# Altium PCB Buck_PCB.PcbDoc
Units mm, origin at the board's own origin, x right, y up, seen from the top; angles counter-clockwise.
Board outline 28.32 x 29.08 mm, 2 copper layers (Top Layer, Bottom Layer); 12 components, 5 nets, 34 pads, 6 vias.
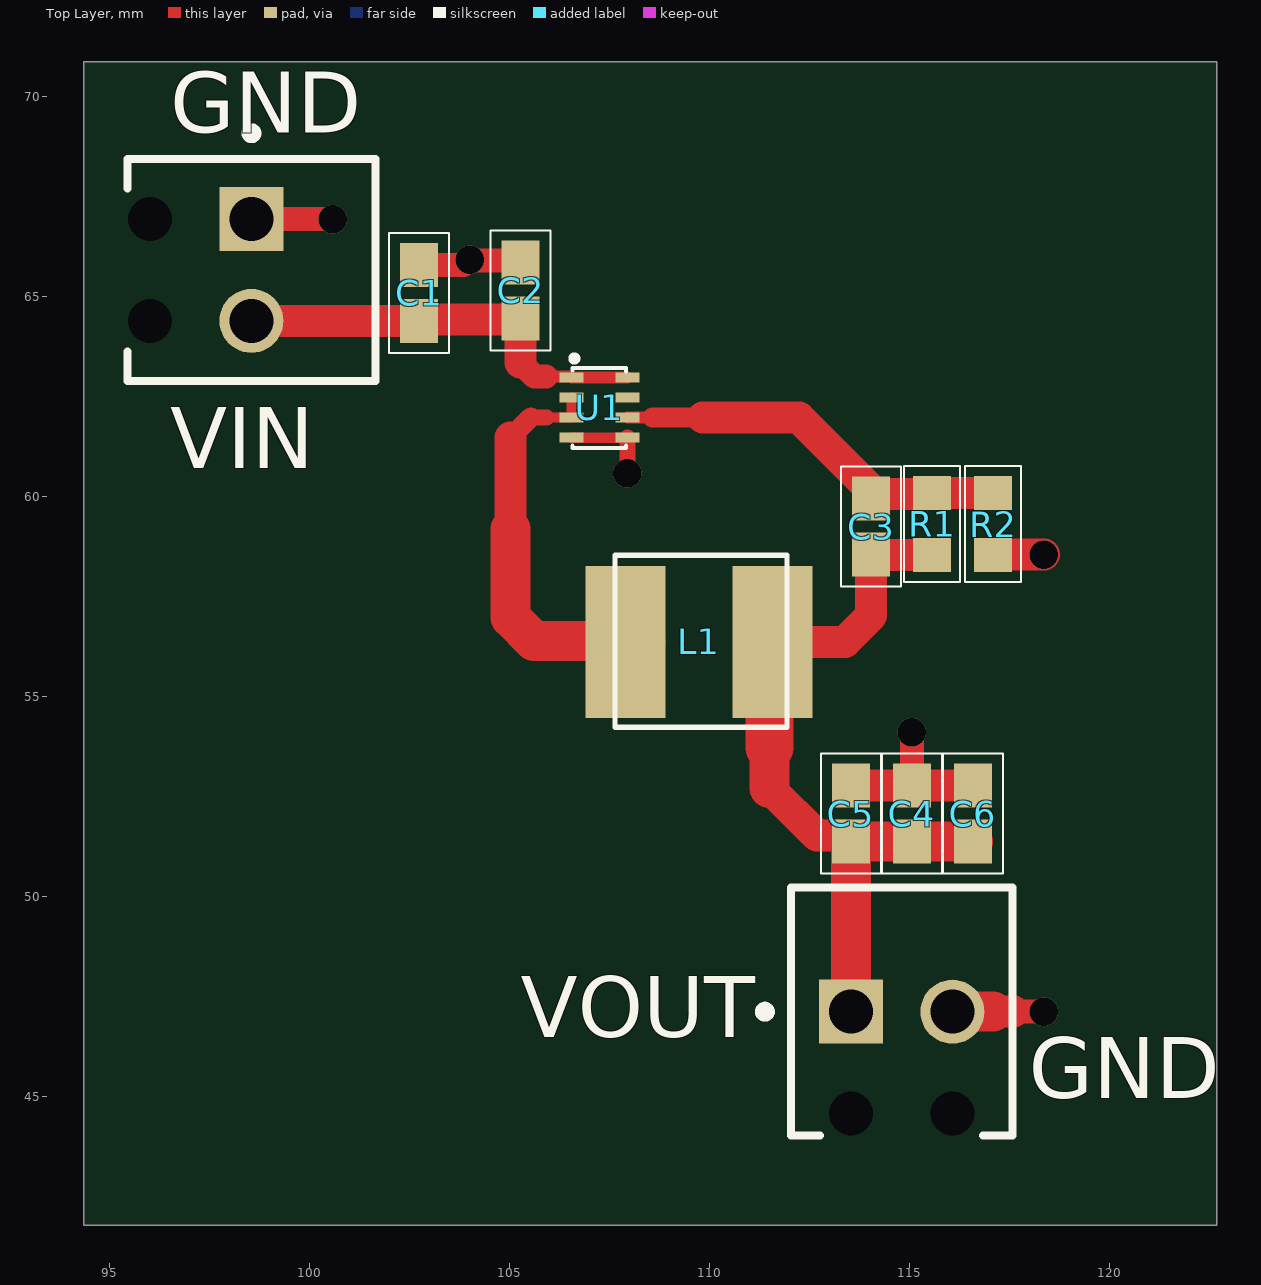
[diagram p0: Top Layer view]
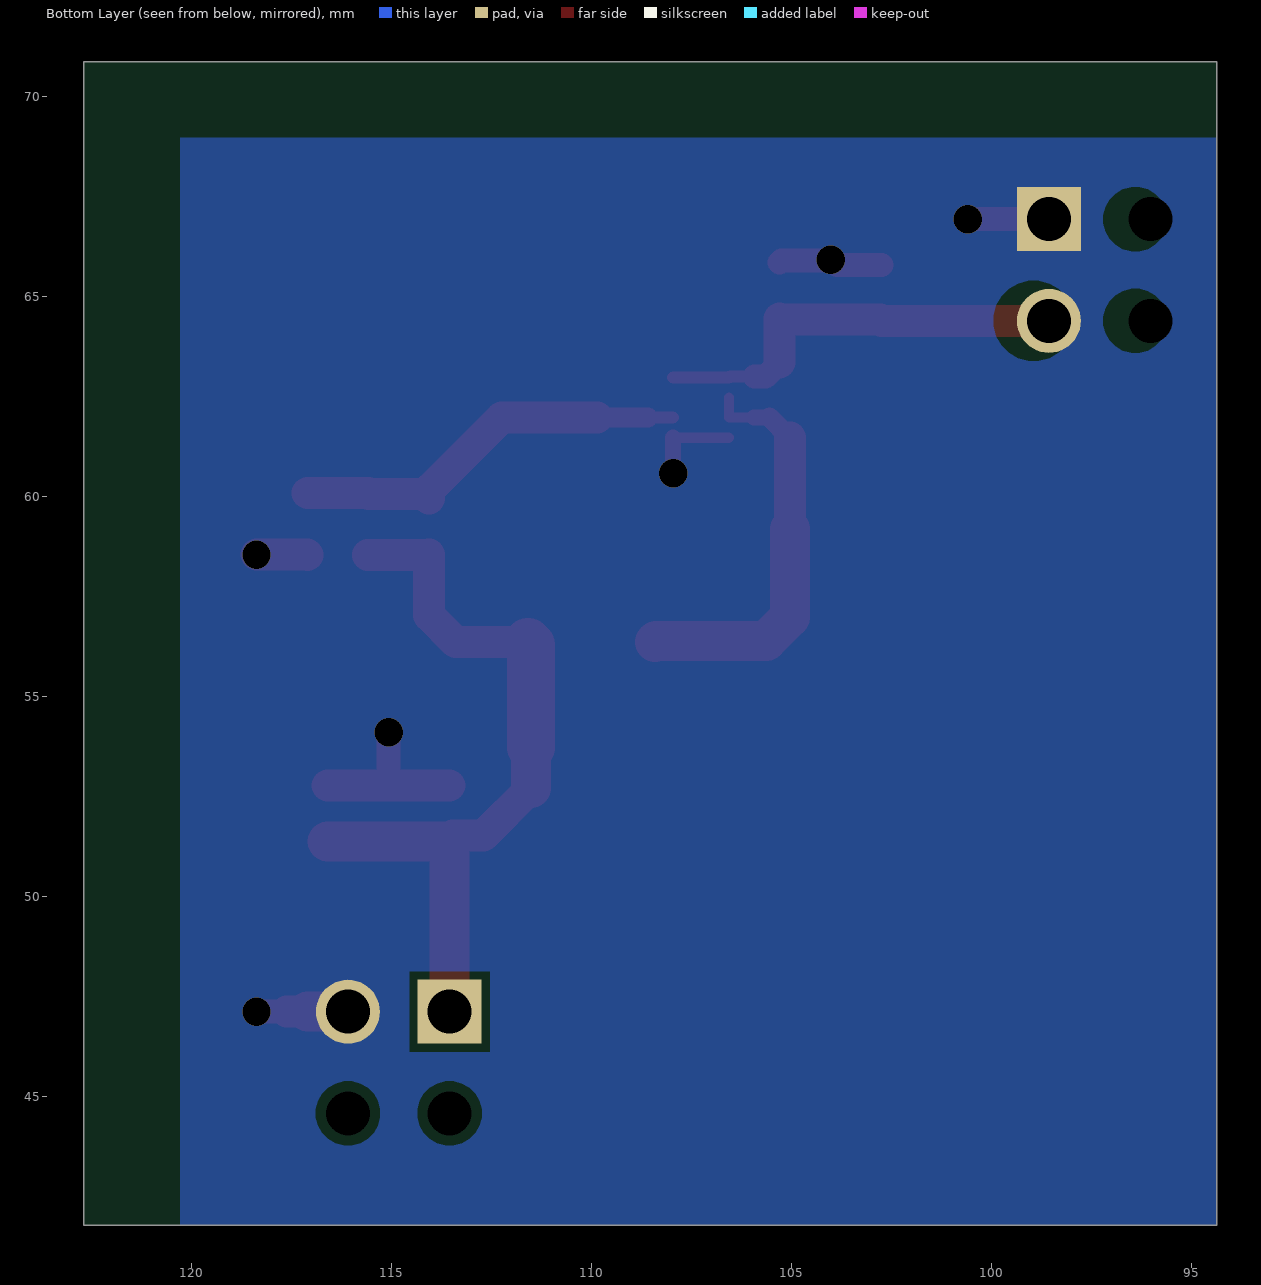
[diagram p1: Bottom Layer view, seen from below]
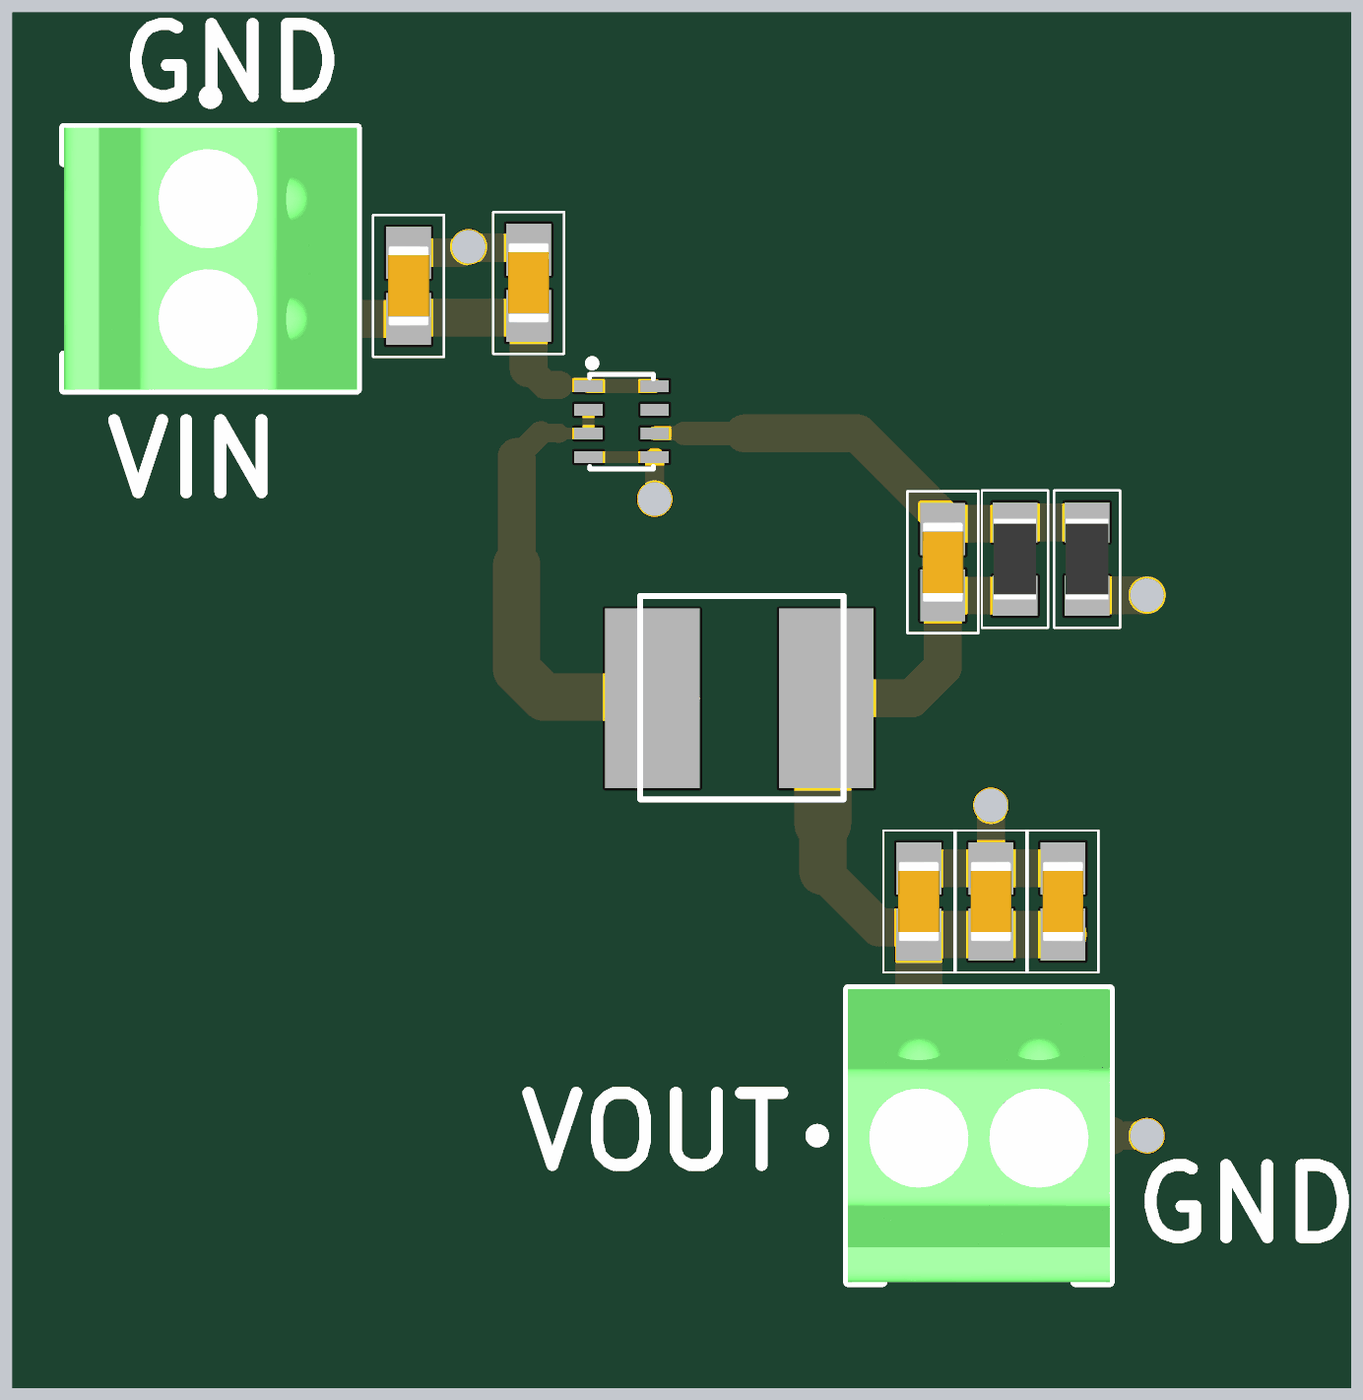
[diagram p2: 3D render of the assembled board from above, using the file's embedded part models]

## Layer stack, top to bottom
Top Solder: solder mask 0.0102, Solder Resist, Dk 3.5
Top Layer: signal copper 0.0356
Dielectric 1: dielectric 0.32, FR-4, Dk 4.8
Bottom Layer: signal copper 0.0356
Bottom Solder: solder mask 0.0102, Solder Resist, Dk 3.5

## Board outline
94.361,41.783 94.361,70.866 122.682,70.866 122.682,41.783

## Design rules (kind name [scope] priority, off if disabled: settings)
Clearance "Stitching No Net" [IsStitchingVia and InNet('No Net') vs (IsVia and (Not IsStitchingVia)) Or IsPad] p1: gap=0.127 ignorepadtopadclearanceinfootprint=FALSE
Clearance [All] p2: gap=0.2 ignorepadtopadclearanceinfootprint=TRUE except(0.102: Arc-Text Track-Text SMDPad-Text THPad-Text Fill-Text Poly-Text Region-Text Text-Text; 0.114: Arc-Arc Arc-Track Arc-SMDPad Arc-Via Track-Track Track-SMDPad Track-Via; 0.127: Via-Text; 0.152: Arc-THPad Track-THPad SMDPad-SMDPad SMDPad-THPad SMDPad-Via THPad-THPad THPad-Via Via-Via; 0.25: Arc-Hole Track-Hole SMDPad-Hole THPad-Hole Via-Hole Fill-Hole Poly-Hole Region-Hole Text-Hole)
ComponentClearance [All] p1: gap=0 collisioncheckmode=3 verticalgap=0 showdistances=FALSE
DiffPairsRouting DIFF90 [InDifferentialPairClass('All Differential Pairs')] p1: maxlimit=0.15 minlimit=0.15 mostfreqgap=0.15 toplayer_minwidth=0.141 toplayer_maxwidth=0.141 toplayer_prefwidth=0.141 bottomlayer_minwidth=0.137 bottomlayer_maxwidth=0.137 bottomlayer_prefwidth=0.137 impedanceprofiledriven=TRUE impedanceprofileid={235DA661-18AF-4E37-B827-B8E0859B5AF9} maxuncoupledlength=12.7
HoleSize [All] p1: absolutevalues=TRUE maxlimit=6.3 minlimit=0.2 maxpercent=80.000 minpercent=20.000
MinimumSolderMaskSliver [All] p1: minsoldermaskwidth=0.08
PlaneConnect [All] p1: pad.planeconnectstyle=Relief pad.reliefexpansion=0.508 pad.reliefentries=4 pad.reliefconductorwidth=0.508 pad.reliefairgap=0.254 via.planeconnectstyle=Direct via.reliefexpansion=0.508 via.reliefentries=4 via.reliefconductorwidth=0.508 via.reliefairgap=0.254
PolygonConnect [All] p1: connectstyle=Direct reliefconductorwidth=0.254 reliefentries=4 polygonreliefangle="90 Angle" airgapwidth=0.254
RoutingVias "General Vias" [All] p1: holewidth=0.2 width=0.45 viastyle="Through Hole" minholewidth=0.2 minwidth=0.45 maxholewidth=0.5 maxwidth=6.3
SilkToSilkClearance [All] p1: silktosilkclearance=0.15
SilkToSolderMaskClearance [IsPad] p1: minsilkscreentomaskgap=0.14 clearancetoexposedcopper=TRUE
SolderMaskExpansion [All] p1: expansion=0.038 istentingtop=FALSE
SupplyNets "Schematic Supply Nets_6" [InNet('VOUT')] p1: voltage=0.000
SupplyNets "Schematic Supply Nets" [InNet('GND')] p2: voltage=0.000
SupplyNets "Schematic Supply Nets_5" [InNet('VIN')] p3: voltage=0.000
UnRoutedNet [All] p1: checkbadconnections=TRUE
Width [All] p1: maxlimit=5 minlimit=0.1 preferedwidth=0.25
22 further rules are at their usual default settings.

## Components (designator, comment, footprint, x,y, rotation, side; value= is the part's Value field where it differs from the comment)
C1 "22µF" CAP_0603 102.743,65.086 r270 top
C2 "0.1µF" CAP_0603 105.283,65.151 r90 top
C3 "10pF" CAP_0603 114.046,59.244 r90 top
C4 "10pF" CAP_0603 115.062,52.07 r90 top
C5 "10pF" CAP_0603 113.538,52.07 r90 top
C6 "10pF" CAP_0603 116.586,52.07 r90 top
L1 "COILCRAFT/LPO2506IB-682" MPL-AL4020-R47 107.95,56.388 r0 top value=0.47uH
R1 "100k" RES_0603 115.57,59.309 r270 top
R2 "49.9k" RES_0603 117.094,59.309 r90 top
U1 "MP1608C" MP1608C_1 106.55,62.968 r0 top
VIN "1725656" CMP-2000-05299-1 98.552,65.659 r270 top (schematic designator J1)
VOUT "1725656" CMP-2000-05299-1 114.808,47.117 r0 top (schematic designator J2)

## Footprints (in the part's own frame and the unit in brackets; to place one, negate y for a bottom-side part, rotate by r counter-clockwise, add the part's x,y. Pads: shape width x height; smd on the part's side, far side on the other; paste and mask are expansions set on the pad)
CAP_0603 [mm]
  rect 1.1x0.95 smd mask+0.05: 1(-0.7,0) 2(0.7,0)
  silkscreen extent -1.5,-0.75 1.5,0.75, body extent -0.85,-0.44 0.85,0.44, height 0.87
CMP-2000-05299-1 [mm] "Connector, 2-Leads, Body 6.2x5.4mm, Pitch 2.54mm"
  rect 1.6x1.6 hole 1.1: 1(-1.27,0)
  round 1.6 hole 1.1: 2(1.27,0)
  round 0 hole 1.1 unplated: MH1(-1.27,-2.54) MH2(1.27,-2.54)
  silkscreen extent -3.54,-3.1 2.77,3.1, body extent -2.77,-3.1 2.77,3.1, height 9
MP1608C_1 [mm]
  rect 0.6x0.25 smd mask+0.051: 1(0,0) 2(0,-0.5) 3(0,-1) 4(0,-1.5) 5(1.4,-1.5) 6(1.4,-1) 7(1.4,-0.5) 8(1.4,0)
  silkscreen extent 0.03,-1.75 1.37,0.51
MPL-AL4020-R47 [mm]
  rect 2x3.8 smd mask+0.051: 1(-0.051,-0.025) 2(3.632,-0.025)
  silkscreen extent -0.3,-2.16 4,2.14
RES_0603 [mm]
  rect 0.85x0.95 smd mask+0.05: 1(-0.775,0) 2(0.775,0)
  silkscreen extent -1.45,-0.7 1.45,0.7, body extent -0.85,-0.45 0.85,0.45, height 0.55

## Part data
C1 C2 C3 C4 C5 C6: library part CAP_0603, "Capacitor SMD 0603 Generic", Capacitance="100 nF", LCSC Part Number=C92490, Manufacturer=YAGEO, Manufacturer Part Number=CC0603KRX7R8BB104, Tolerance=10%
L1: library part TOKO106C, "TOKO106C"
R1 R2: library part RES_0603, "Resistor SMD 0603 Generic", LCSC Part Number=C5197511, Manufacturer=YAGEO, Manufacturer Part Number=NT0603BRD0711K1L, Resistance="11.1 kOhm", Tolerance=0.1%
U1: "The MP1608C is a monolithic, step-down switchmode converter with built-in internal power / MOSFETs. It achieves 6A of continuous output / current (IOUT) from a 2.4V to 5.5V input voltage / (VIN) range, with excellent load and line / regulation. The output voltage (VOUT) can be / regulated to as low as 0.4V. / The constant-on-time (COT) control scheme / provides fast transient response and facilitates / loop stabilization. Fault protections include / cycle-by-cycle current limiting and thermal / shutdown. / The MP1608C is well-suited for a wide range of / applications including high-performance digital / signal processors (DSPs), wireless power, / portable and mobile devices, and other lowpower systems. / The MP1608C requires a minimal number of / readily available, standard external components. / It is available in an ultra-small SOT583 package.", Feedback Voltage (Vfb)=0.6V, Input Voltage (Max)=5.5V, Input Voltage (Min)=2.4V, Manufacturer="Monolithic Power Systems (MPS)", Manufacturer Part Number=MP1608CGTL-P, Operating Junction Temp (Tj)="-40°C to +125°C", Output Current (Max)=6A, Package=SOT583-8, Switching Frequency=1.25MHz, Mounting Type="Surface Mount (SMD)"
VIN VOUT: library part CMP-2000-05299-1, "Male Header, Pitch 2.54 mm, 1 x 2 Position, Height 9 mm, Tail Length 3.5 mm", Colour=Green, Manufacturer="Phoenix Contact", Content=250pc(s), Datasheet URL=http://datasheet.octopart.com/1725656-Phoenix-Contact-datasheet-5302866.pdf, Datasheet Version=Apr-08, Industrial packaging=Yes, Manufacturer part No.=1725656, Manufacturer URL=http://www.phoenixcontact.com/, Number Of Contacts=2, Pitch=2.54mm, Type=MPT0,5/2-2,54

## Via types
v1: diameter 0.711, hole 0.711, Top Layer to Bottom Layer, 6 vias

## Nets (pads, with @x,y where several pads share a name; then routed paths per layer and width w, separated by ;. In a path a pad name is that pad's centre, name@x,y a point inside that pad or via, vN(x,y) a via of type N, cw(c..) or ccw(c..) an arc to the next point about the centre after c; other vN are vias at no path point)
GND: C1.1 C2.2 C4.2 C5.2 C6.2 R2.1 U1.4 U1.5 VIN.1 VOUT.2 | length 14.5
  Top Layer w0.254: U1.4 U1.5
  Top Layer w0.4: v1(107.95,60.579) U1.5
  Top Layer w0.6: VIN.1@98.933,66.929 v1(100.584,66.929) ; C1.1 103.856,65.786 103.983,65.913 v1(104.013,65.913) 104.034,65.892 105.242,65.892 C2.2 ; C4.2 v1(115.062,54.102) ; 117.602,47.117 v1(118.364,47.117)
  Top Layer w0.8: C5.2 C4.2 C6.2 ; 117.094,47.117 117.602,47.117 ; R2.1 117.107,58.547 v1(118.364,58.547)
  Top Layer w1: VOUT.2 117.094,47.117
NetC3_2: C3.2 R1.1 R2.2 U1.6 | length 9.9
  Top Layer w0.3: U1.6 108.577,61.968
  Top Layer w0.5: 108.577,61.968 109.847,61.968
  Top Layer w0.8: 109.847,61.968 112.239,61.968 C3.2@113.996,60.211 ; C3.2 114.046,59.984 114.121,60.059 115.545,60.059 R1.1 R2.2
NetL1_1: L1.1 U1.2 U1.3 | length 10.4
  Top Layer w0.25: 105.926,61.968 U1.3 U1.2
  Top Layer w0.4: 105.537,61.976 105.918,61.976 105.926,61.968
  Top Layer w0.5: 105.029,61.468 105.537,61.976
  Top Layer w0.8: 105.029,59.182 105.029,61.468
  Top Layer w1: 105.029,59.182 105.029,56.974 105.615,56.388 108.382,56.388 L1.1@108.407,56.363
VIN: C1.2 C2.1 U1.1 U1.8 VIN.2 | length 10.3
  Top Layer w0.3: 105.918,62.992 106.526,62.992 U1.1 U1.8
  Top Layer w0.6: 105.283,63.343 105.634,62.992 105.918,62.992
  Top Layer w0.8: VIN.2@98.933,64.389 98.935,64.387 102.742,64.387 C1.2 102.775,64.418 105.251,64.418 C2.1 105.283,63.343
VOUT: C3.1 C4.1 C5.1 C6.1 L1.2 R1.2 VOUT.1 | length 19.4
  Top Layer w0.8: 111.506,52.705 112.691,51.52 113.463,51.52 113.538,51.445 C5.1 ; L1.2 113.386,56.363 114.046,57.023 C3.1 114.051,58.539 115.565,58.539 R1.2
  Top Layer w1: 111.506,52.705 111.506,53.721 ; VOUT.1 C5.1 C4.1 C6.1
  Top Layer w1.2: 111.506,53.721 111.506,56.286 L1.2
pads on no net: U1.7 VIN.MH1 VIN.MH2 VOUT.MH1 VOUT.MH2

## Polygon pours and split planes (outlines as drawn)
GND on Bottom Layer "GND_L02_P003" (solid, pour order 3): 94.361,41.783 94.361,68.961 120.269,68.961 120.269,41.783

## Silkscreen, mask and mechanical layers (free items; w line width, h text height)
Top Overlay:
  text "GND" at 96.52,69.088 h1.52
  text "GND" at 117.983,44.958 h1.52